# Altium PCB PCB1.PcbDoc
Units mil, origin at the board's own origin, x right, y up, seen from the top; angles counter-clockwise.
Board outline 1205 x 1555 mil, 2 copper layers (Top Layer, Bottom Layer); 13 components, 8 nets, 39 pads, 0 vias.
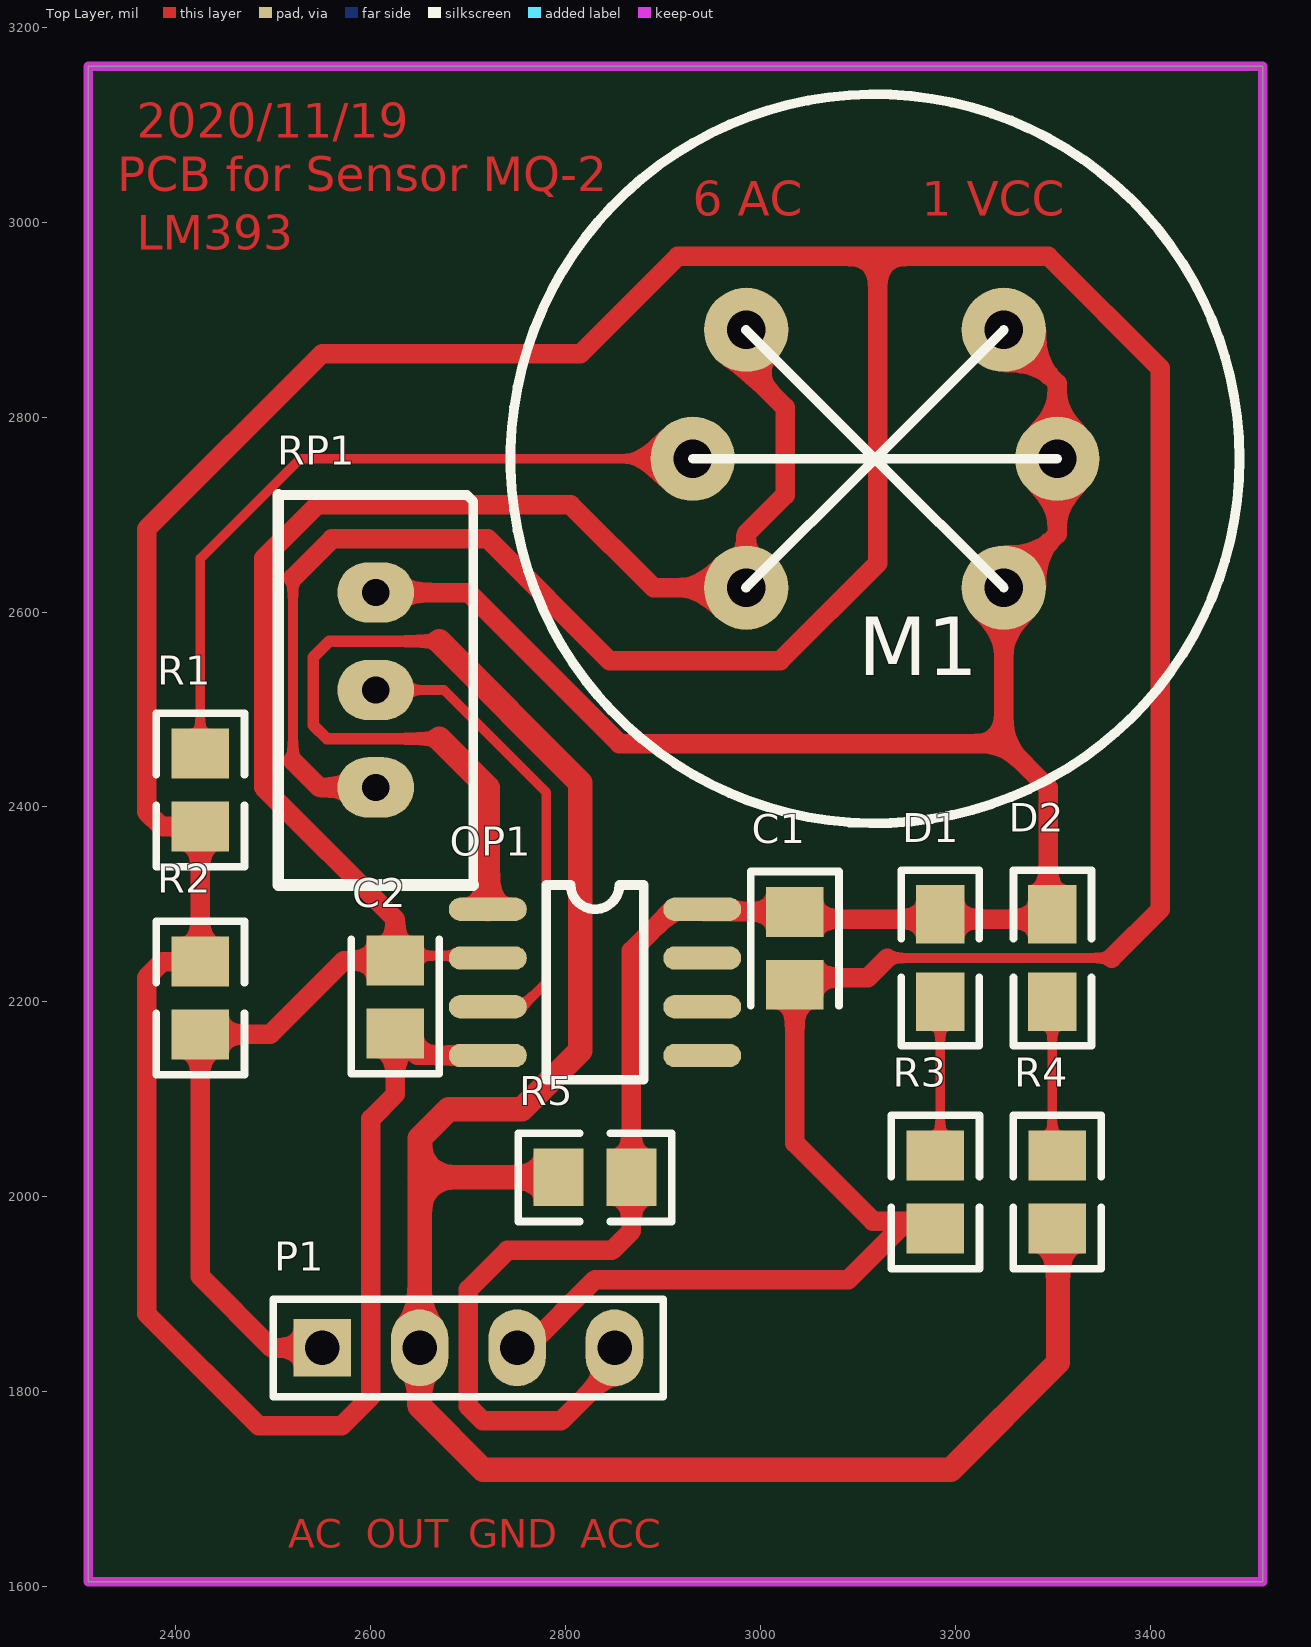
[diagram p0: Top Layer view]
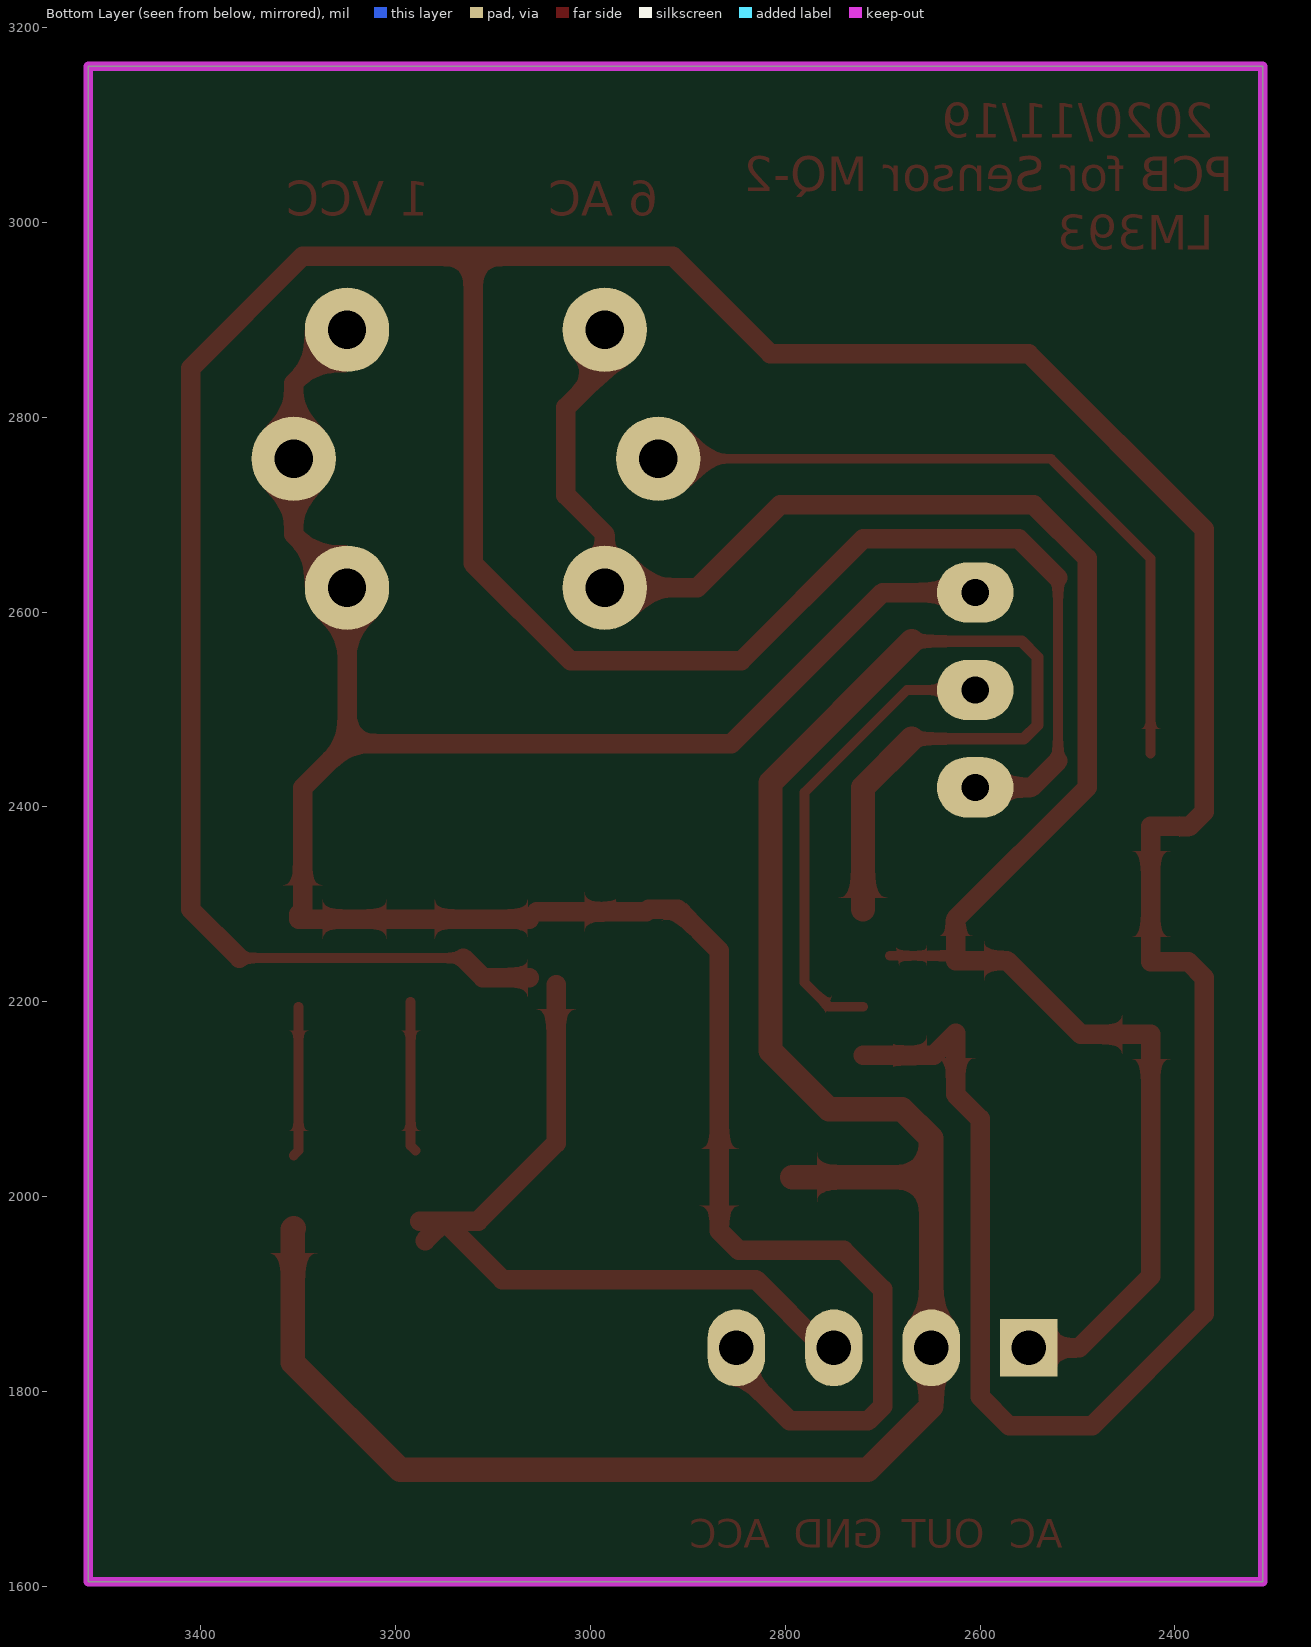
[diagram p1: Bottom Layer view, seen from below]
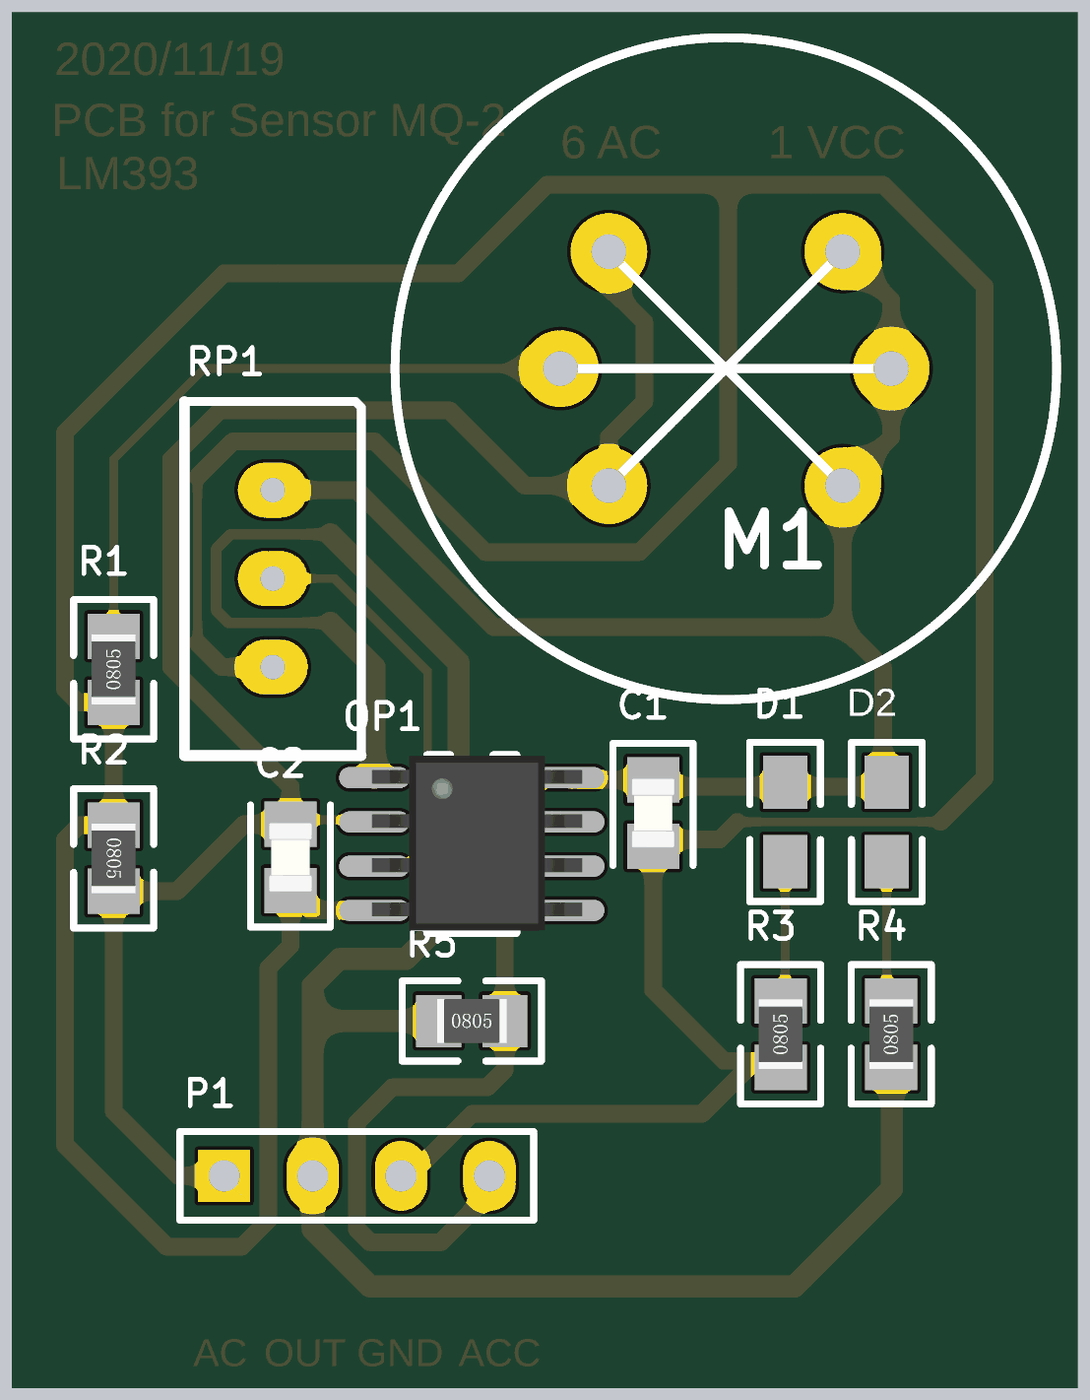
[diagram p2: 3D render of the assembled board from above, using the file's embedded part models]

## Layer stack, top to bottom
Top Solder: solder mask 0.4, Solder Resist, Dk 3.5
Top Layer: signal copper 1.4
Dielectric 1: dielectric 12.6, FR-4, Dk 4.8
Bottom Layer: signal copper 1.4
Bottom Solder: solder mask 0.4, Solder Resist, Dk 3.5

## Board outline
2310,1605 2310,3160 3515,3160 3515,1605

## Design rules (kind name [scope] priority, off if disabled: settings)
Clearance [All] p1: gap=10 ignorepadtopadclearanceinfootprint=FALSE except(0: Arc-Hole Track-Hole SMDPad-Hole THPad-Hole Via-Hole Fill-Hole Poly-Hole Region-Hole Text-Hole)
PolygonConnect [All] p1: connectstyle=Relief reliefconductorwidth=10 reliefentries=4 polygonreliefangle="90 Angle" airgapwidth=10
RoutingVias [All] p1: holewidth=28 width=50 viastyle="Through Hole" minholewidth=28 minwidth=50 maxholewidth=28 maxwidth=50
SolderMaskExpansion [All] p1: expansion=4
Width [All] p1: maxlimit=10 minlimit=10 preferedwidth=10
30 further rules are at their usual default settings.

## Components (designator, comment, footprint, x,y, rotation, side; value= is the part's Value field where it differs from the comment)
C1 "Cap Chip 0805" CC2012-0805 3035,2255 r270 top value=104
C2 "Cap Chip 0805" CC2012-0805 2625,2205 r90 top value=104
D1 "LED2" 0805 3184.24,2290 r270 top
D2 "LED2" 0805 3299.24,2290 r270 top
M1 "MQ-2" PCBComponent_1 3117.23,2757.23 r180 top
OP1 "LM393/P/DR/PW" SOP8 2721,2296 r0 top
P1 "Header 4" HDR1X4 2550,1845 r0 top
R1 "Resistor Chip 0805" CR2012-0805 2425,2417.4 r90 top value=1K
R2 "Resistor Chip 0805" CR2012-0805 2425,2203.93 r270 top value=1K
R3 "Resistor Chip 0805" CR2012-0805 3179.24,2005 r90 top value=1K
R4 "Resistor Chip 0805" CR2012-0805 3304.24,2005 r90 top value=1K
R5 "Resistor Chip 0805" CR2012-0805 2830,2020 r0 top value=10K
RP1 "Res Adj Pot" RES-VR-L 2605,2420 r90 top value=10K

## Footprints (in the part's own frame and the unit in brackets; to place one, negate y for a bottom-side part, rotate by r counter-clockwise, add the part's x,y. Pads: shape width x height; smd on the part's side, far side on the other; paste and mask are expansions set on the pad)
0805 [mil]
  rect 60x50 smd: 1(0,0) 2(90,0)
  silkscreen extent -45,-40 135,40
CC2012-0805 [mm]
  rect 1.3x1.5 smd: 1(-0.95,0) 2(0.95,0)
  silkscreen extent -2,-1.15 1.5,1.15, body extent -1,-0.62 1,0.63, height 0.5
CR2012-0805 [mm]
  rect 1.3x1.5 smd: 1(-0.95,0) 2(0.95,0)
  silkscreen extent -2,-1.15 2,1.15, body extent -1,-0.63 1,0.63, height 0.55
HDR1X4 [mm] "Connector; Header; 4 Position"
  rect 1.5x1.5 hole 0.9: 1(0,0)
  oval 1.5x2 hole 0.9: 2(2.54,0) 3(5.08,0) 4(7.62,0)
  silkscreen extent -1.27,-1.27 8.89,1.27
PCBComponent_1 [mm]
  round 2.2 hole 1: 1(-3.359,-3.359) 2(-4.75,0) 3(-3.359,3.359) 4(3.359,3.359) 5(4.75,0) 6(3.359,-3.359)
  silkscreen extent -9.5,-9.5 9.5,9.5
RES-VR-L [mil] "滑动变阻器"
  oval 62x78.74 hole 28: 1(0,0) 3(100,0)
  oval 62.01x78.74 hole 28: 2(200,0)
  silkscreen extent -100,-100 300,100
SOP8 [mil] "（蒜米工坊）"
  oval 80x24 smd: 1(-1,-1) 2(-1,-51) 3(-1,-101) 4(-1,-151) 5(219,-151) 6(219,-101) 7(219,-51) 8(219,-1)
  silkscreen extent 59,-176 159,24, body extent -4,-174 234,24, height 63

## Part data
C1 C2: "Polarized Capacitor (Radial)", Published=8-Jun-2000, Publisher="Altium Limited", Revision="July-2002: Re-released for DXP Platform."
D1 D2: "Typical RED, GREEN, YELLOW, AMBER GaAs LED", LatestRevisionDate=17-Jul-2002, LatestRevisionNote="Re-released for DXP Platform.", PackageDescription="SM LED; 2 Flat Leads", PackageReference=3.2X1.6X1.1, PackageVersion=Feb-2002, Published=8-Jun-2000, Publisher="Altium Limited"
P1: "Header, 4-Pin", LatestRevisionDate=17-Jul-2002, LatestRevisionNote="Re-released for DXP Platform.", Publisher="Altium Limited"
R1 R2 R3 R4 R5: "Resistor", Published=8-Jun-2000, Publisher="Altium Limited", Revision="July-2002: Re-released for DXP Platform."
RP1: "Potentiometer", Published=8-Jun-2000, Publisher="Altium Limited", Revision="July-2002: Re-released for DXP Platform.", Set Position=0.5

## Nets (pads, with @x,y where several pads share a name; then routed paths per layer and width w, separated by ;. In a path a pad name is that pad's centre, name@x,y a point inside that pad or via, vN(x,y) a via of type N, cw(c..) or ccw(c..) an arc to the next point about the centre after c; other vN are vias at no path point)
AC: C2.2 M1.4 M1.6 OP1.2 P1.1 R2.2 | length 2030.7
  Top Layer w10: C2.2@2625,2247.4 OP1.2@2692.4,2247.4 ; M1.6@2985,2850 M1.6 M1.6@2995,2879.47
  Top Layer w20: P1.1 2498.26,1845 2425,1918.26 R2.2 2496.53,2166.53 2572.4,2242.4 C2.2 ; C2.2@2625,2247.4 2625,2285 2490,2420 2490,2655 2545,2710 2805,2710 2890,2625 M1.4 2985,2680 3025,2720 3025,2810 M1.6@2985,2850
GND: C1.2 C2.1 OP1.4 P1.3 R1.1 R2.1 R3.1 RP1.1 | length 5934.8
  Top Layer w10: 2520,2447.28 2520,2635 ; P1.3 P1.3@2760,1845 ; 3130,2245 3360,2245
  Top Layer w20: 2520,2447.28 2547.28,2420 RP1.1 ; 2520,2635 2560,2675 2720,2675 2845,2550 3020,2550 3120,2650 3120,2965 ; OP1.4 2647.6,2145 C2.1 2625,2105 2600,2080 2600,1795 2570,1765 2485,1765 2370,1880 2370,2225 2386.33,2241.33 R2.1 R1.1 2385,2380 2370,2395 2370,2685 2550,2865 2815,2865 2915,2965 3120,2965 ; P1.3@2760,1845 2830,1915 3090,1915 3149.62,1974.62 R3.1@3169.24,1955 ; C1.2 3035,2055 3115,1975 R3.1@3175,1975 ; C1.2@3062.4,2225 3110,2225 3130,2245 ; 3360,2245 3410,2295 3410,2850 3295,2965 3120,2965
IN: OP1.3 RP1.3 | length 483.8
  Top Layer w10: RP1.3 2675,2520 2780,2415 2780,2220 2755,2195 OP1.3
NetD1_2: D1.2 R3.2 | length 154.7
  Top Layer w10: R3.2@3179.24,2047.4 3184.24,2052.4 D1.2
NetD2_2: D2.2 R4.2 | length 154.7
  Top Layer w10: D2.2@3299.24,2195 3299.24,2047.4 R4.2
NetM1_5: M1.5 R1.2 | length 747.8
  Top Layer w10: R1.2 2425,2655 2527.23,2757.23 M1.5
OUT: OP1.1 P1.2 R4.1 R5.1 | length 2501.3
  Top Layer w12: 2670,2470 2555,2470 2541,2484 2541,2553.72 2557.28,2570 2670,2570
  Top Layer w25: 2670,2470 2720,2420 OP1.1 ; 2670,2570 2815,2425 2815,2150 2755,2090 2680,2090 2650,2060 2650,2020 ; R5.1 2650,2020 ; R4.1 3305,1966.84 3305,1830 3195,1720 2715,1720 2650,1785 P1.2 2650,2020
VCC: C1.1 D1.1 D2.1 M1.1 M1.2 M1.3 OP1.8 P1.4 R5.2 RP1.2 | length 2614.9
  Top Layer w10: OP1.8 OP1.8@2942.6,2292.4
  Top Layer w20: RP1.2 2700,2620 2855,2465 3249.47,2465 ; P1.4 2850,1825 2795,1770 2715,1770 2700,1785 2700,1905 2740,1945 2847.4,1945 2867.4,1965 R5.2 2867.4,2252.4 2910,2295 OP1.8 ; OP1.8@2942.6,2292.4 C1.1 C1.1@3055,2292.4 ; C1.1@3062.4,2285 D2.1@3295,2285 ; M1.1 3304.24,2834.69 M1.2 3304.24,2679.77 M1.3 3249.47,2465 ; D2.1@3295,2290 3295,2419.47 3249.47,2465 ; D2.1@3299.24,2285 D2.1
pads on no net: OP1.5 OP1.6 OP1.7

## Keep-outs
Keep-Out Layer:
  the board outline again, w10

## Other copper
Top Layer:
  text "2020/11/19" at 2360,3075 h60
  text "PCB for Sensor MQ-2" at 2340,3020 h60
  text "6 AC" at 2930.23,2995 h60
  text "1 VCC" at 3165,2995 h60
  text "LM393" at 2360,2960 h60
  text "AC" at 2515,1630 h50
  text "OUT" at 2595,1630 h50
  text "GND" at 2700,1630 h50
  text "ACC" at 2815,1630 h50